# Altium PCB LED Dice.PcbDoc
Units mil, origin at the board's own origin, x right, y up, seen from the top; angles counter-clockwise.
Board outline 1950 x 950 mil, 4 copper layers (Layer 1, Layer 2, Layer 3, Layer 4), stack 22.373 mil thick; 52 components, 42 nets, 198 pads, 65 vias.
Unrouted connection lines stored in the file: 8.
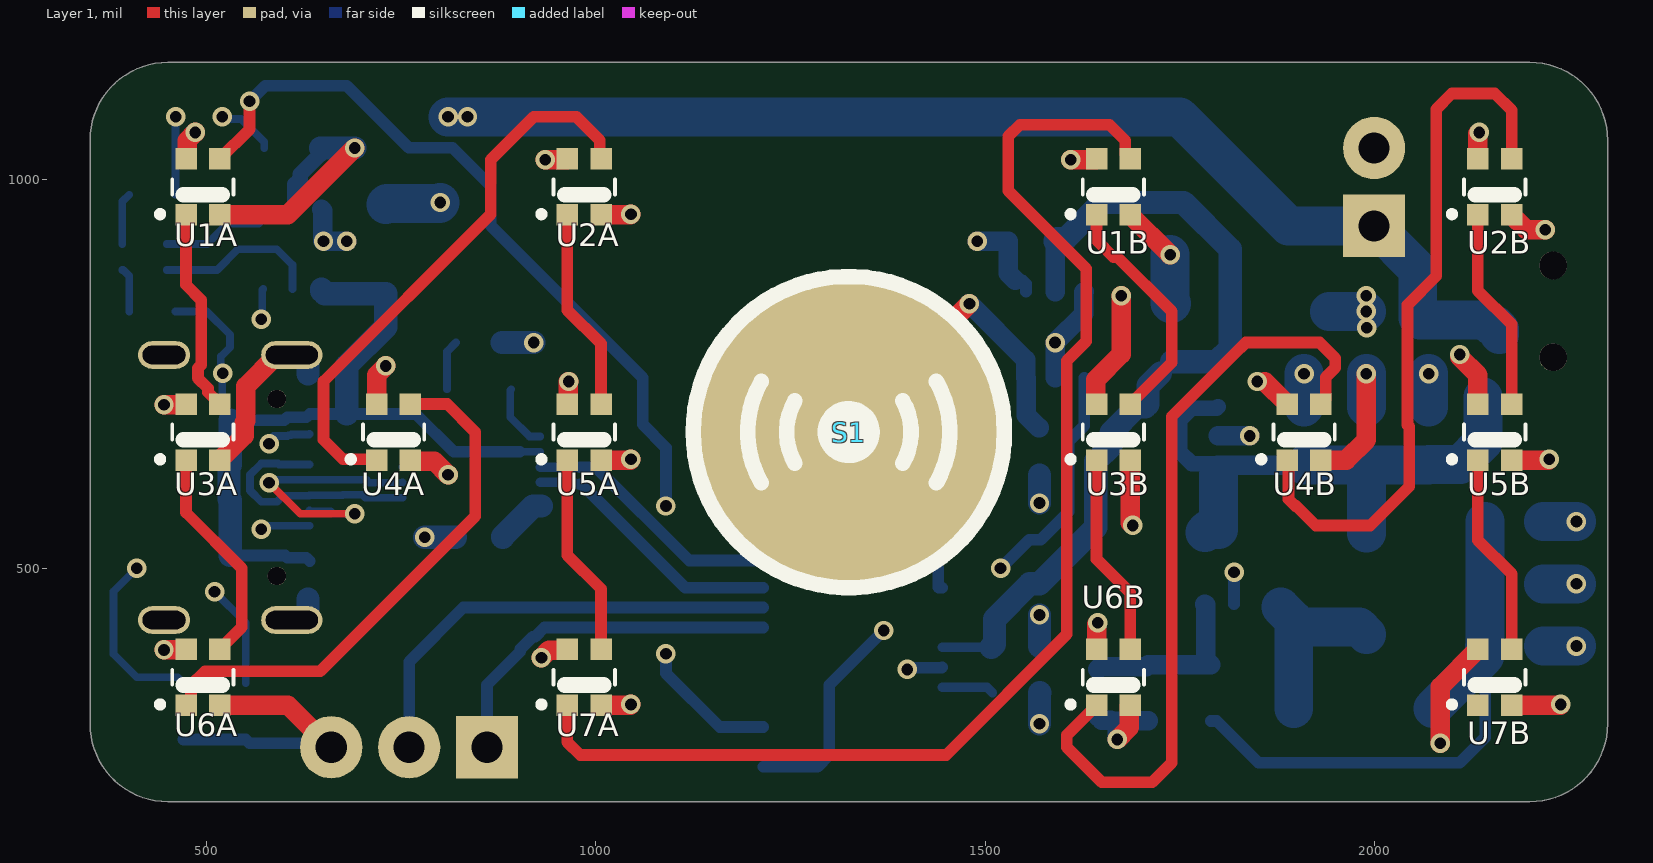
[diagram p0: Layer 1 view]
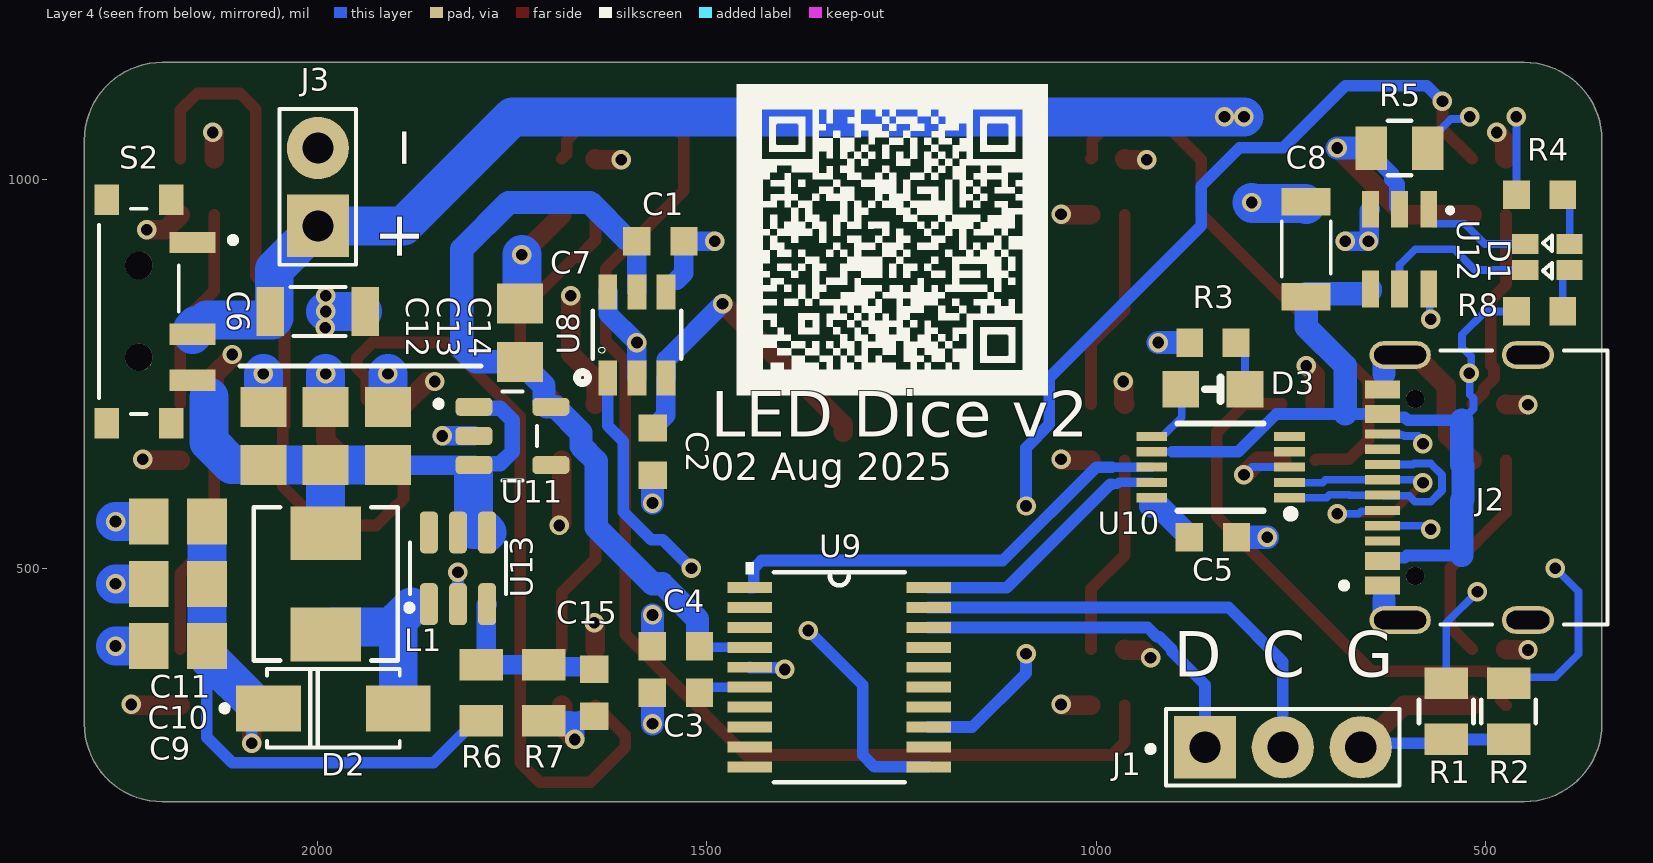
[diagram p1: Layer 4 view, seen from below]
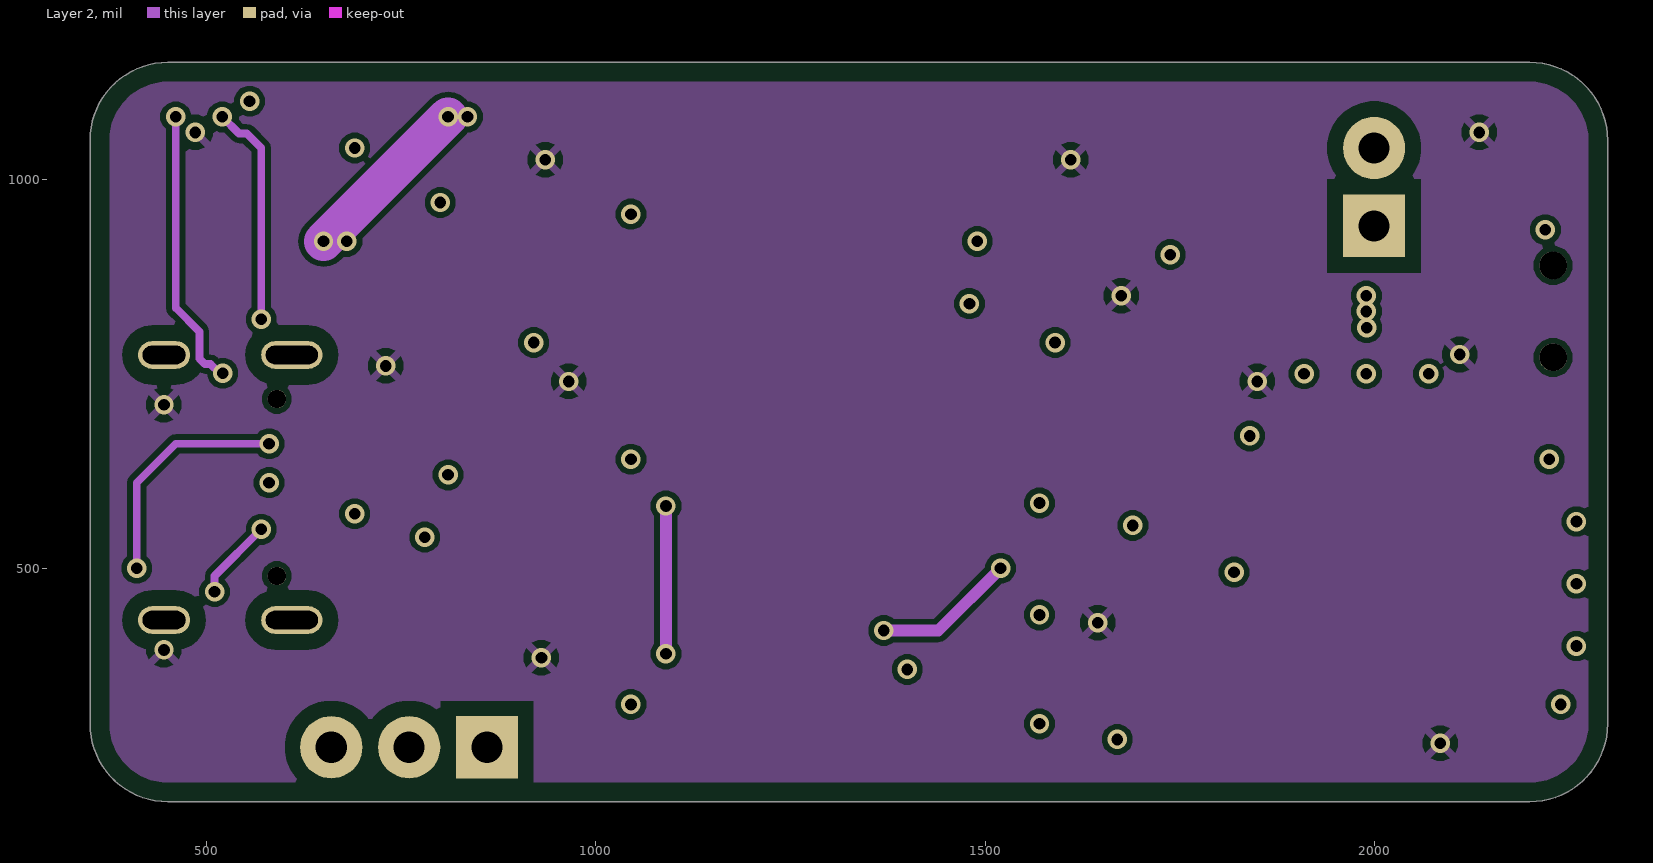
[diagram p2: Layer 2]
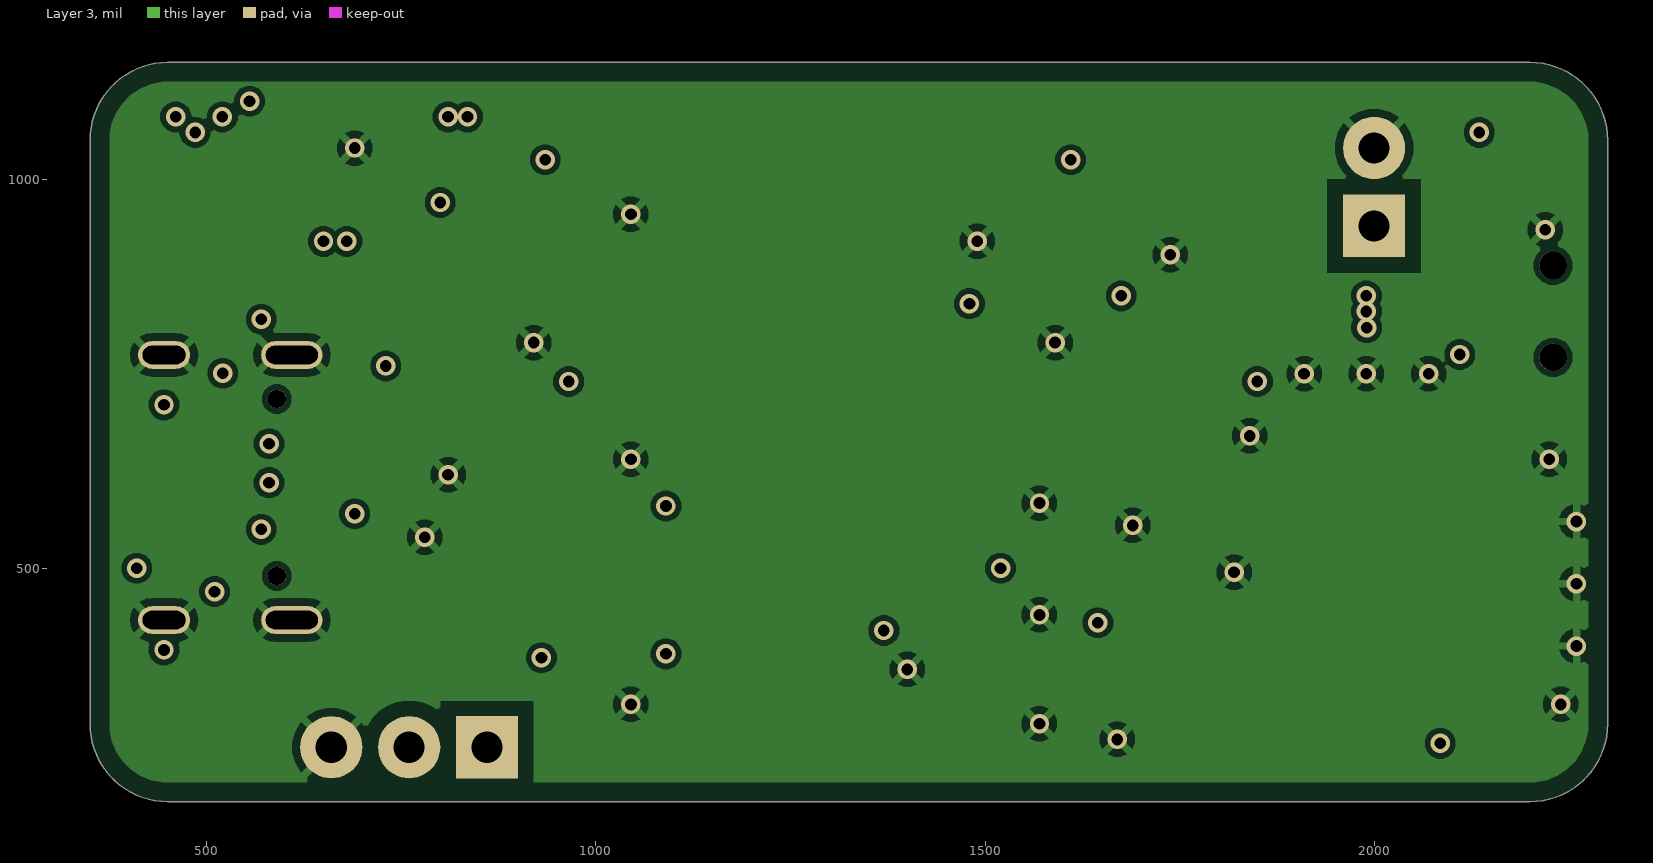
[diagram p3: Layer 3]
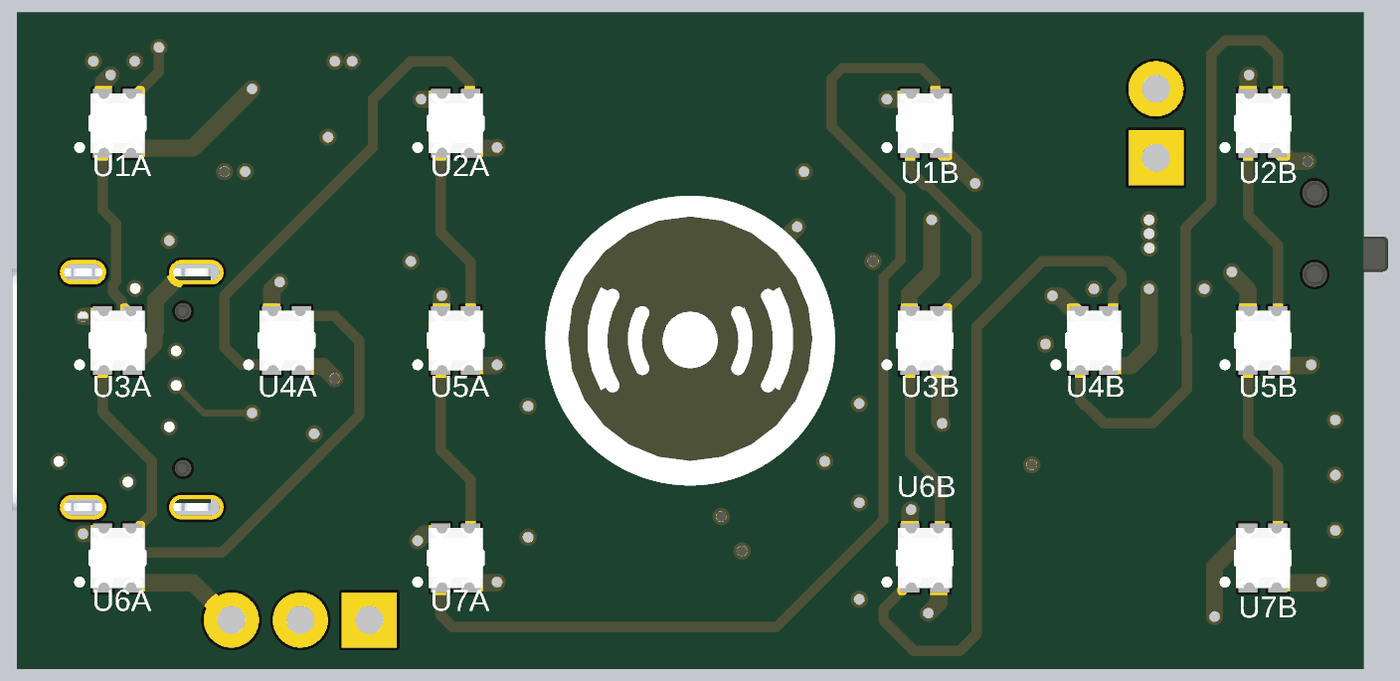
[diagram p4: 3D render of the assembled board from above, using the file's embedded part models]
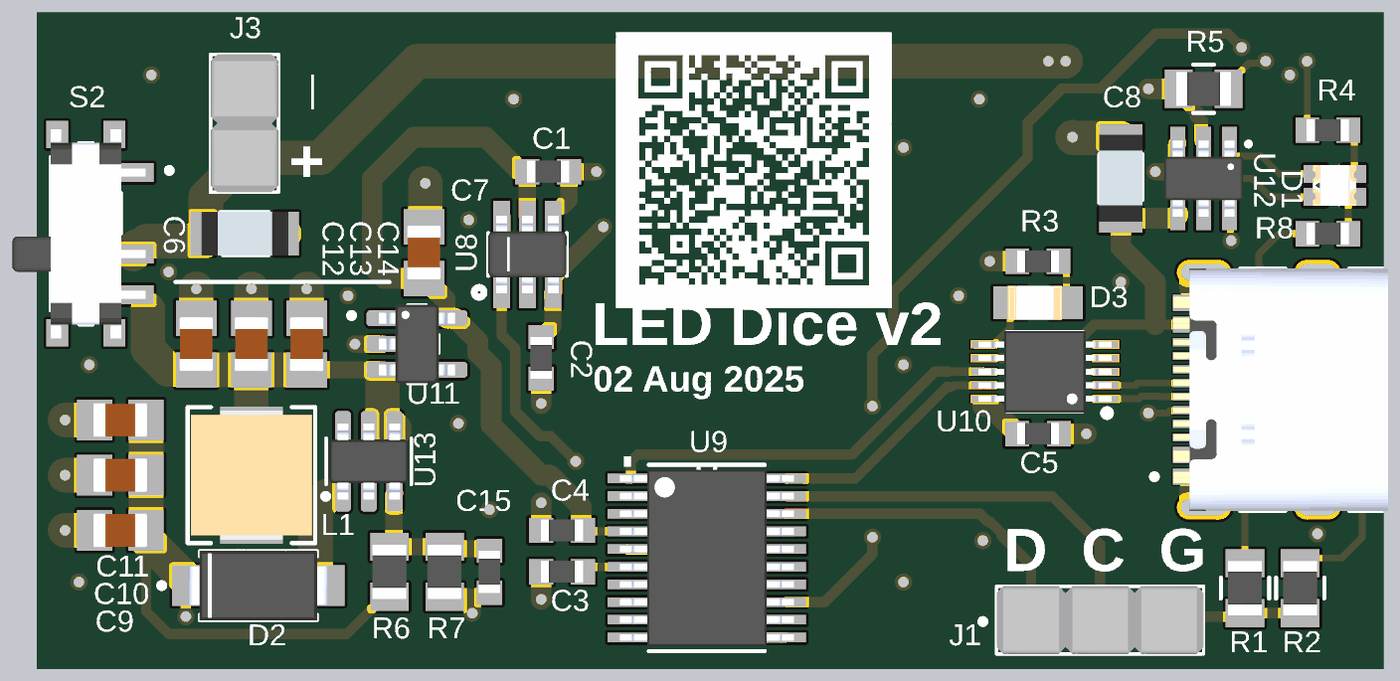
[diagram p5: 3D render of the assembled board from below, using the file's embedded part models]

## Layer stack, top to bottom
Top Solder: solder mask 0.4, Solder Resist, Dk 3.5
Layer 1: signal copper 1.378
Dielectric 2: prepreg 2.8, PP-006, Dk 4.1
Layer 2: signal copper 0.7087
Dielectric 1: dielectric 12.6, FR-4, Dk 4.8
Layer 3: signal copper 0.7087
Dielectric 3: prepreg 2.8, PP-006, Dk 4.1
Layer 4: signal copper 1.378
Bottom Solder: solder mask 0.4, Solder Resist, Dk 3.5

## Board outline
450,200 cw(c450,300) 350,300 350,1050 cw(c450,1050) 450,1150 2200,1150 cw(c2200,1050) 2300,1050 2300,300 cw(c2200,300) 2200,200

## Design rules (kind name [scope] priority, off if disabled: settings)
Clearance [All] p1: gap=7 ignorepadtopadclearanceinfootprint=FALSE except(20: SMDPad-Fill SMDPad-Poly SMDPad-Region THPad-Fill THPad-Poly THPad-Region)
PlaneClearance [All] p1: clearance=30
PolygonConnect [All] p1: connectstyle=Relief reliefconductorwidth=10 reliefentries=4 polygonreliefangle="45 Angle" airgapwidth=10
RoutingVias [All] p1: holewidth=15 width=25 viastyle="Through Hole" minholewidth=6 minwidth=10 maxholewidth=150 maxwidth=200
SolderMaskExpansion [All] p1: expansion=4 istentingtop=FALSE
SupplyNets "Schematic Supply Nets_1" [InNet('GND')] p1: voltage=0.000
SupplyNets "Schematic Supply Nets" [InNet('VUSB+')] p2: voltage=0.000
Width [All] p1: maxlimit=300 minlimit=10 preferedwidth=25
29 further rules are at their usual default settings.

## Classes and differential pairs
component class uC1: C1 C2 C3 C4 J1 S1 U8 U9
component class PS1: C5 C6 C7 C8 C9 C10 C11 C12 C13 C14 C15 D1 D2 D3 J2 J3 L1 R1 R2 R3 R4 R5 R6 R7 R8 S2 U10 U11 U12 U13
component class B: U1B U2B U3B U4B U5B U6B U7B
component class A: U1A U2A U3A U4A U5A U6A U7A
channel class "LED Matrix": A B

## Components (designator, comment, footprint, x,y, rotation, side; value= is the part's Value field where it differs from the comment)
C1 "CL10B104KB8NNNC" CAPC1608X90N 1560,920 r0 bottom
C2 "CL10C080DB81PNC" CAPC1608X90N 1570,650 r90 bottom
C3 "CL10B104KB8NNNC" CAPC1608X90N 1540,340 r180 bottom
C4 "CL10B104KB8NNNC" CAPC1608X90N 1540,400 r180 bottom
C5 "CL10B104KB8NNNC" CAPC1608X90N 850,540 r0 bottom
C6 "CL31A106KBHNNNE" WCAP-CSGP_885012208060 2000,830 r180 bottom
C7 "0805B105K500NT" CAPC2012X135N 1740,802.6 r90 bottom
C8 "CL31A106KBHNNNE" WCAP-CSGP_885012208060 730,910 r90 bottom
C9 "CL21A106KAYNNNE" CAPC2012X135N 2180,400 r180 bottom
C10 "CL21A106KAYNNNE" CAPC2012X135N 2180,480 r180 bottom
C11 "0805B104K500NT" CAPC2012X135N 2180,560 r0 bottom
C12 "CL21A106KAYNNNE" CAPC2012X135N 2070,670 r270 bottom
C13 "CL21A106KAYNNNE" CAPC2012X135N 1990,670 r270 bottom
C14 "0805B104K500NT" CAPC2012X135N 1910,670 r90 bottom
C15 "CL10B104KB8NNNC" CAPC1608X90N 1645,340 r90 bottom
D1 "LTST-C195KGJRKT" LTST-BILED-15X16 420,900 r270 bottom
D2 "SS115" DIOM4325X250N 1980,320 r180 bottom
D3 "LTST-C171KRKT" DIOC200X125X110 850,730 r0 bottom
J1 "826646-3" TE_826646-3 760,270 r180 bottom
J2 "TYPE-C-31-M-12" HRO_TYPE-C-31-M-12 445.12,603.78 r90 bottom
J3 "826646-2" TE_826646-2 2000,990 r90 bottom
L1 "FXL0420-6R8-M" IND_FXL0420_CMT 1990,480 r90 bottom
R1 "0805W8F5101T5E" RESC2012X65N 550,316.22 r90 bottom
R2 "0805W8F5101T5E" RESC2012X65N 470,316.22 r270 bottom
R3 "0603WAF1001T5E" RESC1508X60N 850,790 r0 bottom
R4 "0603WAF1001T5E" RESC1508X60N 430,980 r0 bottom
R5 "0805W8F5101T5E" RESC2012X65N 610,1040 r180 bottom
R6 "0805W8F1103T5E" RESC2012X65N 1790,340 r270 bottom
R7 "0805W8F1502T5E" RESC2012X65N 1710,340 r90 bottom
R8 "0603WAF1001T5E" RESC1508X60N 430,830 r0 bottom
S1 "touch pad 1 cm" "touch pad 1 cm" 1325,675 r0 top
S2 "EG1215AA" SW_EG1215AA 2230,830 r270 bottom
U1A "WS2812C-2020" LED_WS2812C-2020 495,990 r90 top (schematic designator U1)
U1B "WS2812C-2020" LED_WS2812C-2020 1665,990 r90 top (schematic designator U1)
U2A "WS2812C-2020" LED_WS2812C-2020 985,990 r90 top (schematic designator U2)
U2B "WS2812C-2020" LED_WS2812C-2020 2155,990 r90 top (schematic designator U2)
U3A "WS2812C-2020" LED_WS2812C-2020 495,675 r90 top (schematic designator U3)
U3B "WS2812C-2020" LED_WS2812C-2020 1665,675 r90 top (schematic designator U3)
U4A "WS2812C-2020" LED_WS2812C-2020 740,675 r90 top (schematic designator U4)
U4B "WS2812C-2020" LED_WS2812C-2020 1910,675 r90 top (schematic designator U4)
U5A "WS2812C-2020" LED_WS2812C-2020 985,675 r90 top (schematic designator U5)
U5B "WS2812C-2020" LED_WS2812C-2020 2155,675 r90 top (schematic designator U5)
U6A "WS2812C-2020" LED_WS2812C-2020 495,360 r90 top (schematic designator U6)
U6B "WS2812C-2020" LED_WS2812C-2020 1665,360 r90 top (schematic designator U6)
U7A "WS2812C-2020" LED_WS2812C-2020 985,360 r90 top (schematic designator U7)
U7B "WS2812C-2020" LED_WS2812C-2020 2155,360 r90 top (schematic designator U7)
U8 "TTP223-BA6-TD" SOT23-6#1 1590,800 r180 bottom
U9 "STM32G030F6P6" *TSSOP20 1330,360 r180 bottom
U10 "CH340E" MSOP10 840,630 r0 bottom
U11 "TLV74333PDBVR" SOT95P280X145-5N 1750,670 r180 bottom
U12 "TP4057" SOT23-6#2 610,910 r0 bottom
U13 "MT3608" SOT95P280X145-6N 1820,500 r90 bottom

## Footprints (in the part's own frame and the unit in brackets; to place one, negate y for a bottom-side part, rotate by r counter-clockwise, add the part's x,y. Pads: shape width x height; smd on the part's side, far side on the other; paste and mask are expansions set on the pad)
*TSSOP20 [mil]
  rect 57.56x13.97 smd: 1(-115,115.16) 2(-115,89.57) 3(-115,63.98) 4(-115,38.39) 5(-115,12.8) 6(-115,-12.8) 7(-115,-38.39) 8(-115,-63.98) 9(-115,-89.57) 10(-115,-115.16) 11(115,-115.16) 12(115,-89.57) 13(115,-63.98) 14(115,-38.39) 15(115,-12.8) 16(115,12.8) 17(115,38.39) 18(115,63.98) 19(115,89.57) 20(115,115.16)
  silkscreen extent -120,-135 84,148, body extent -126,-128 126,128, height 47
CAPC1608X90N [mm]
  rect 0.89x0.93 smd: 1(-0.77,0) 2(0.77,0)
  body extent -0.77,-0.4 0.77,0.4, height 0.6
CAPC2012X135N [mm]
  rect 1.3x1.5 smd: 1(-0.95,0) 2(0.95,0)
  body extent -1,-0.63 1,0.63, height 1.44
DIOC200X125X110 [mm]
  rect 1.2x1.2 smd: NEG(-1.05,0) POS(1.05,0)
  silkscreen extent -0.25,-0.38 0.25,0.38, body extent -0.89,-0.62 1.11,0.63, height 1.1
DIOM4325X250N [mm]
  rect 2.12x1.5 smd: A(2.115,0) C(-2.115,0)
  silkscreen extent -3.66,-1.28 2.16,1.28, body extent -2.57,-1.28 2.57,1.28, height 2.5
HRO_TYPE-C-31-M-12 [mm]
  rect 0.6x1.14 smd mask+0.05: A1_B12(-3.2,4.75) A4_B9(-2.4,4.75) B1_A12(3.2,4.75) B4_A9(2.4,4.75)
  rect 0.3x1.14 smd mask+0.05: A5(-1.25,4.75) A6(-0.25,4.75) A7(0.25,4.75) A8(1.25,4.75) B5(1.75,4.75) B6(0.75,4.75) B7(-0.75,4.75) B8(-1.75,4.75)
  oval 0.9x2 hole 0.6 slot 1.7 at 90 deg: S1(-4.325,4.17) S2(4.325,4.17)
  oval 0.9x1.7 hole 0.6 slot 1.4 at 90 deg: S3(-4.325,0) S4(4.325,0)
  round 0.6 hole 0.6 unplated: ""(-2.89,3.68) ""(2.89,3.68)
  silkscreen extent -4.47,-2.6 4.47,6.1, body extent -4.47,-2.6 4.47,5.31, height 3.31
IND_FXL0420_CMT [mil]
  rect 69x91 smd paste+0 mask+0: 1(-65,0) 2(65,0)
  silkscreen extent -98,-92 98,92, body extent -94,-87 94,87, height 79
LED_WS2812C-2020 [mm]
  rect 0.7x0.7 smd: 1(-0.915,0.55) 2(-0.915,-0.55) 3(0.915,-0.55) 4(0.915,0.55)
  silkscreen extent -0.99,-1 0.25,1.5, body extent -1.1,-1 1.1,1, height 0.84
LTST-BILED-15X16 [mm]
  rect 0.65x0.85 smd: P$1(0.425,0.725) P$2(-0.425,0.725) P$3(0.425,-0.725) P$4(-0.425,-0.725)
  silkscreen extent -0.7,-0.15 0.7,0.15, body extent -0.75,-0.8 0.75,0.8, height 0.55
MSOP10 [mm]
  rect 1x0.3 smd paste-1 mask+0.05: 1(-2.25,1) 2(-2.25,0.5) 3(-2.25,0) 4(-2.25,-0.5) 5(-2.25,-1) 6(2.25,-1) 7(2.25,-0.5) 8(2.25,0) 9(2.25,0.5) 10(2.25,1)
  silkscreen extent -2.41,-1.43 1.4,1.65, body extent -2.45,-1.5 2.45,1.5, height 1
RESC1508X60N [mm]
  rect 0.87x0.93 smd: 1(-0.755,0) 2(0.755,0)
  body extent -0.77,-0.4 0.78,0.4, height 0.6
RESC2012X65N [mm]
  rect 1.03x1.42 smd: 1(-0.92,0) 2(0.92,0)
  silkscreen extent -0.38,-0.89 0.38,0.89, body extent -1,-0.63 1,0.63, height 0.65
SOT23-6#1 [mil]
  rect 24x45 smd: 1(-37.4,-55.28) 2(0,-55.28) 3(37.4,-55.28) 4(37.4,55.28) 5(0,55.28) 6(-37.4,55.28)
  silkscreen extent -77,-62 57,31, body extent -57,-56 57,56, height 50
SOT23-6#2 [mil]
  rect 21.65x47.24 smd: 1(-37.4,-51.18) 2(0,-51.18) 3(37.4,-51.18) 4(37.4,51.18) 5(0,51.18) 6(-37.4,51.18)
  silkscreen extent -66,-51 -64,-49, body extent -57,-55 57,55, height 57
SOT95P280X145-5N [mm]
  rrect50% 1.21x0.59 smd: 1(-1.255,0.95) 2(-1.255,0) 3(-1.255,-0.95) 4(1.255,-0.95) 5(1.255,0.95)
  silkscreen extent -2.51,-1.45 0.8,1.45, body extent -1.4,-1.45 1.4,1.45, height 1.45
SOT95P280X145-6N [mm]
  rrect50% 1.37x0.59 smd: 1(-1.17,0.95) 2(-1.17,0) 3(-1.17,-0.95) 4(1.17,-0.95) 5(1.17,0) 6(1.17,0.95)
  silkscreen extent -1.39,-1.57 0.85,1.69, body extent -1.4,-1.45 1.4,1.45, height 1.45
SW_EG1215AA [mm]
  rect 0.7x1.5 smd: 1(-2.25,1.75) 2(0.75,1.75) 3(2.25,1.75)
  rect 1x0.8 smd: S1(-3.65,1.05) S2(-3.65,-1.05) S3(3.65,-1.05) S4(3.65,1.05)
  round 0.9 hole 0.9 unplated: ""(-1.5,0) ""(1.5,0)
  silkscreen extent -3.35,-1.3 3.35,3.17, body extent -3.85,-2.7 3.85,2.2, height 1.4
TE_826646-2 [mil]
  rect 80x80 hole 40: 1(-50,0)
  round 80 hole 40: 2(50,0)
  silkscreen extent -100,-49 100,49, body extent -100,-49 100,49, height 343
TE_826646-3 [mil]
  rect 80x80 hole 40: 1(-100,0)
  round 80 hole 40: 2(0,0) 3(100,0)
  silkscreen extent -174,-49 150,49, body extent -150,-49 150,49, height 343
"touch pad 1 cm" [mil]
  round 400 smd paste-99999 mask-99999: 1(0,0)
  silkscreen extent -200,-200 200,200, body extent -196,-194 197,200, height 4
WCAP-CSGP_885012208060 [mm]
  rect 0.9x1.6 smd: 1(-1.55,0) 2(1.55,0)
  silkscreen extent -0.9,-0.8 0.9,0.8, body extent -1.58,-0.8 1.62,0.8, height 0.98

## Part data
C1 C3 C4 C5 C15: "0.1ÂµF Â±10% 50V Ceramic Capacitor X7R 0603 _1608 Metric_", Package="0603 Samsung", Availability=Unavailable, MF="Samsung Electro-Mechanics", MP=CL10B104KB8NNNC, Price=None, SnapEDA_Link=https://www.snapeda.com/parts/CL10B104KB8NNNC/Samsung%20Electro-Mechanics/view-part/3598309/?ref=snap
C2: "50V 8pF C0G 0603 Multilayer Ceramic Capacitors MLCC - SMD/SMT ROHS", Package=None, Availability=Unavailable, MP=GRM0335C1E8R0CA01D, Price=None
C6 C8: "50V 10uF X5R ±10% 1206 Multilayer Ceramic Capacitors MLCC - SMD/SMT ROHS", Package=None, Availability=Unavailable, MP=885012208060, Price=None
C7: "50V 1uF X7R ±10% 0805 Multilayer Ceramic Capacitors MLCC - SMD/SMT ROHS"
C9 C10 C12 C13: "25V 10uF X5R ±10% 0805 Multilayer Ceramic Capacitors MLCC - SMD/SMT ROHS", Package=None, Availability=Unavailable, MP=CL31A106KPHNNNE, Price=None
C11 C14: "50V 100nF X7R ±10% 0805 Multilayer Ceramic Capacitors MLCC - SMD/SMT ROHS", Supplier Part Number 1=1763-1217-1-ND, Supplier 1=Digikey
D1: "Green, Red 571nm Green, 631nm Red LED Indication - Discrete 2V Green, 2V Red 0606 (1616 Metric)", Package=None, Availability="In Stock", Check_prices=https://www.snapeda.com/parts/LTST-C195KGJRKT/Lite-On+Inc./view-part/?ref=eda, MF="Lite-On Inc.", MP=LTST-C195KGJRKT, Price=None, Purchase-URL=https://pricing.snapeda.com/search?q=LTST-C195KGJRKT&ref=eda, SnapEDA_Link=https://www.snapeda.com/parts/LTST-C195KGJRKT/Lite-On+Inc./view-part/?ref=snap
D2: "1A, 150V, Schottky Rectifier", Package="DO-214AC-2 Taiwan Semiconductor", Supplier Part Number 1=1801-SS115TR-ND, Availability="In Stock", Check_prices=https://www.snapeda.com/parts/SS115/Taiwan+Semiconductor/view-part/?ref=eda, MF="Taiwan Semiconductor", MP=SS115, Price=None, Purchase-URL=https://pricing.snapeda.com/search/part/SS115/?ref=eda, SnapEDA_Link=https://www.snapeda.com/parts/SS115/Taiwan+Semiconductor/view-part/?ref=snap, Supplier 1=Digikey
D3: "Red LED  0805 _2012 Indication 631nm - Discrete 2V 0805 _2012 Metric_", Package="0805 Lite-On", Availability=Unavailable, MF="Lite-On Inc.", MP=LTST-C171KRKT, Price=None, SnapEDA_Link=https://www.snapeda.com/parts/LTST-C171KRKT/Lite-On%20Inc./view-part/357775/?ref=snap
J1: "Connector Header Through Hole 3 position 0.100 (2.54mm)", Package=None, Arrow_Europe-Purchase-URL=https://snapeda.com/shop?store=Arrow+Europe&id=2389612, Availability=Good, DigiKey-Purchase-URL=https://snapeda.com/shop?store=DigiKey&id=2389612, EU_RoHS_Compliance=Compliant, MF="TE Connectivity", Mouser-Purchase-URL=https://snapeda.com/shop?store=Mouser&id=2389612, MP=826646-3, Price=None, SnapEDA_Link=https://www.snapeda.com/parts/826646-3/TE%20Connectivity%20AMP%20Connectors/view-part/2389612/?ref=snap
J2: "USB Connectors 24 Receptacle 1 8.94*7.3mm RoHS", Package=Package, Availability="Not in stock", Check_prices=https://www.snapeda.com/parts/TYPE-C-31-M-12/HRO+Electronics+Co.%252C+Ltd./view-part/?ref=eda, MF="HRO Electronics Co., Ltd.", MP=TYPE-C-31-M-12, Price=None, SnapEDA_Link=https://www.snapeda.com/parts/TYPE-C-31-M-12/HRO+Electronics+Co.%252C+Ltd./view-part/?ref=snap
J3: "Conn Unshrouded Header HDR 2 POS 2.54mm Solder ST Thru-Hole", Package=None, Availability=Good, Centerline_Pitch="2.54 mm[.1 in]", DigiKey-Purchase-URL=https://snapeda.com/shop?store=DigiKey&id=470405, EU_RoHS_Compliance=Compliant, MF="TE Connectivity", Mouser-Purchase-URL=https://snapeda.com/shop?store=Mouser&id=470405, MP=826646-2, Number_of_Positions=2, Price=None, Product_Type=Connector, SnapEDA_Link=https://www.snapeda.com/parts/826646-2/TE%20Connectivity%20AMP%20Connectors/view-part/470405/?ref=snap
L1: "Description", Manufacturer_Name=Cjiang, Copyright="Copyright (C) 2025 Ultra Librarian. All rights reserved.", Manufacturer_Part_Number=FXL0420-6R8-M
R1 R2 R5: "5.1kΩ 0805  125mW Thick Film Resistors 150V ±100ppm/℃ ±1% Chip Resistor - Surface Mount ROHS"
R3 R4 R8: "1kΩ 0603 100mW Thick Film Resistors 75V ±100ppm/℃ ±1%  Chip Resistor - Surface Mount ROHS"
R6: "110kΩ 0805  125mW Thick Film Resistors 150V ±100ppm/℃ ±1% Chip Resistor - Surface Mount ROHS", Supplier Part Number 1=303-0805W8F1001T5E, Supplier 1=Mouser
R7: "15kΩ 0805  125mW Thick Film Resistors 150V ±100ppm/℃ ±1% Chip Resistor - Surface Mount ROHS", Supplier Part Number 1=303-0805W8F1001T5E, Supplier 1=Mouser
S1: "Touch pad circular 1 cm"
S2: "Slide Switch SPDT Surface Mount, Right Angle", Package=None, Check_prices=https://www.snapeda.com/parts/EG1215AA/E-Switch/view-part/?ref=eda, MF=E-Switch, MP=EG1215AA, Purchase-URL=https://pricing.snapeda.com/search/part/EG1215AA/?ref=eda, SnapEDA_Link=https://www.snapeda.com/parts/EG1215AA/E-Switch/view-part/?ref=snap
U1A U1B U2A U2B U3A U3B U4A U4B U5A U5B U6A U6B U7A U7B: "Intelligent control LED integrated light source", Package=Package, Check_prices=https://www.snapeda.com/parts/WS2812C-2020/Worldsemi/view-part/?ref=eda, MF=Worldsemi, MP=WS2812C-2020, SnapEDA_Link=https://www.snapeda.com/parts/WS2812C-2020/Worldsemi/view-part/?ref=snap
U8: "1 key touchpad detector IC", Package=None, Availability="Not in stock", Check_prices=https://www.snapeda.com/parts/TTP223-BA6/TONTEK/view-part/?ref=eda, MF=tontek, MP=TTP223-BA6, Price=None, SnapEDA_Link=https://www.snapeda.com/parts/TTP223-BA6/TONTEK/view-part/?ref=snap
U9: "ARMÂ® CortexÂ®-M0+ STM32G0 Microcontroller IC 32-Bit Single-Core 64MHz 32KB (32K x 8) FLASH 20-TSSOP", Package="TSSOP-20 STMicroelectronics", Check_prices=https://www.snapeda.com/parts/STM32G030F6P6/STMicroelectronics/view-part/?ref=eda, MF=STMicroelectronics, MP=STM32G030F6P6, SnapEDA_Link=https://www.snapeda.com/parts/STM32G030F6P6/STMicroelectronics/view-part/?ref=snap
U10: "USB to serial chip CH340", Package=Package, Check_prices=https://www.snapeda.com/parts/CH340E/WCH/view-part/?ref=eda, MF=WCH, MP=CH340E, SnapEDA_Link=https://www.snapeda.com/parts/CH340E/WCH/view-part/?ref=snap
U11: "300mA Fixed 3.3V Positive electrode 5.5V SOT-23-5 Voltage Regulators - Linear, Low Drop Out (LDO) Regulators ROHS", Package="SOT-23-5 Texas Instruments", Availability=Warning, Check_prices=https://www.snapeda.com/parts/TLV74330PDBVR/Texas%20Instruments/view-part/2878367/?ref=eda, MF="Texas Instruments", MP=TLV74330PDBVR, Price=None, Purchase-URL=https://pricing.snapeda.com/search/part/TLV74330PDBVR/?ref=eda, SnapEDA_Link=https://www.snapeda.com/parts/TLV74330PDBVR/Texas%20Instruments/view-part/2878367/?ref=snap
U12: "500mA linear li-ion battery charger TP4057 actual charge current to 500ma,", Package=None, Availability="Not in stock", Check_prices=https://www.snapeda.com/parts/TP4057/Top+Power/view-part/?ref=eda, MF=toppower, MP=TP4057, Price=None, SnapEDA_Link=https://www.snapeda.com/parts/TP4057/Top+Power/view-part/?ref=snap
U13: "High Efficiency 1.2MHz2A Step Up Converter", Package=Package, Availability="Not in stock", Check_prices=https://www.snapeda.com/parts/MT3608/Aerosemi+Technology+Co.%252C+Ltd/view-part/?ref=eda, MF="Aerosemi Technology Co., Ltd", MP=MT3608, Price=None, SnapEDA_Link=https://www.snapeda.com/parts/MT3608/Aerosemi+Technology+Co.%252C+Ltd/view-part/?ref=snap

## Via types
v1: diameter 25, hole 15, Layer 1 to Layer 4, tented both sides, 65 vias

## Nets (pads, with @x,y where several pads share a name; then routed paths per layer and width w, separated by ;. In a path a pad name is that pad's centre, name@x,y a point inside that pad or via, vN(x,y) a via of type N, cw(c..) or ccw(c..) an arc to the next point about the centre after c; other vN are vias at no path point)
+3.3V: C1.2 C4.2 C7.1 U8.5 U9.4 U11.5 | length 1063.8
  Layer 4 w12: U9.4 C4.2@1508.07,398.39
  Layer 4 w25: U8.5@1590.16,855.43 C1.2@1590.16,919.84
  Layer 4 w30: C4.2@1508.07,398.39 C4.2 1512.2,402.52 1512.2,434.53 1557.67,480 1570,480 1642.31,552.31 1642.31,637.46 1661.9,657.05 1661.9,674.15 1695.16,707.4 U11.5 1706.02,707.4 1709.41,710.79 1709.41,734.61 C7.1@1725.47,750.67 ; C1.2@1590.16,919.84 C1.2 1590.32,920.79 1592.83,923.31 1603.72,923.31 1650.41,970 1755,970 1815,910 1815,782.77 1797.43,765.2 C7.1
+5V: C9.2 C10.2 C11.1 D2.C R6.2 U1A.4 U1B.4 U2A.4 U2B.4 U3A.4 U3B.4 U4A.4 U4B.4 U5A.4 U5B.4 U6A.4 U6B.4 U7A.4 U7B.4 | length 1589.6
  Layer 1 w15: v1@1643.35,428.35 v1(1645,430) ; v1(1850,740) v1@1859.37,740 ; v1@2110,771.69 v1(2110,774.67) ; v1@2133.35,1058.35 v1(2135,1060)
  Layer 1 w25: v1(445,395) 472.32,395 U6A.4 ; v1(445,710) 472.32,710 U3A.4 ; U1A.4 474.63,1027.3 474.63,1049.37 485,1059.75 v1(485,1060) ; U4A.4 718.35,748.35 v1(730,760) ; v1(930,385) 939.74,394.74 962.07,394.74 U7A.4 ; v1(935,1025) 962.32,1025 U2A.4 ; U5A.4 964.63,712.3 964.63,739.63 v1(965,740) ; v1(1610,1025) 1642.32,1025 U1B.4 ; U6B.4 v1@1643.35,428.35 ; U3B.4 1642.48,711.89 1642.48,742.48 1675,775 v1(1675,850) ; v1@1859.37,740 U4B.4 ; v1(2085,275) 2085,347.68 U7B.4 ; v1@2110,771.69 2133.35,748.35 U5B.4 ; U2B.4 v1@2133.35,1058.35
  Layer 4 w15: R6.2 1797.68,303.78 1851.46,250 2110,250 2142.6,282.6 C9.2 ; D2.C@2075.47,320 2085,310.47 v1(2085,275)
  Layer 4 w50: D2.C@2075.47,320 2142.01,386.54 2142.01,399.41 C9.2 C10.2 C11.1
Batt+: C6.2 J3.1 S2.2 U12.3 | length 1853.1
  Layer 2 w50: v1(650,920) v1(810,1080)
  Layer 4 w25: U12.3 649.07,959.51 649.07,920.93 v1(650,920) v1(680,920)
  Layer 4 w50: v1(810,1080) 1750,1080 1890,940 J3.1 2056.1,883.9 2056.1,821.93 2058.86,819.17 2142.4,819.17 2149.88,811.69 2156.57,811.69 2161.1,807.17 S2.2 ; C6.2@1942.52,830 v1(1990,830)
  other v1: 1990.4,809.17 1990,850 835,1080
DIN_A: U1A.3 U9.13 | length 1334.5
  Layer 1 w15: U1A.3 555,1064.37 v1(555,1100)
  Layer 2 w15: v1(1090,390) v1(1090,580)
  Layer 4 w15: v1(555,1100) 575,1120 680,1120 759.5,1040.5 815.71,1040.5 865,991.21 865,940 1060,745 1060,685 1090,655 v1(1090,580) ; v1(1090,390) 1090,365 1158.98,296.02 U9.13
DIN_B: U1B.3 U7A.1 | length 1643.1
  Layer 1 w15: U7A.1 963.35,276.65 980,260 1450,260 1605,415 1605,766.82 1630,791.82 1630,885 1530,985 1530,1055 1545,1070 1660,1070 1680.37,1049.63 1680.37,1032.3 U1B.3
DN: J2.A7 J2.B7 U10.2 | length 360.8
  Layer 1 w10: v1(580,610) 620,570 v1(690,570)
  Layer 4 w10: v1(580,610) 587,610.03 590.59,613.62 J2.A7 705.07,613.62 708.69,610 751.1,610 U10.2 ; J2.B7 633.03,573.35 659.15,573.35 662.5,570 v1(690,570)
DOUT_B: U7B.1
DP: J2.A6 J2.B6 U10.1 | length 310.6
  Layer 4 w10: J2.B6 592.86,633.31 591.67,634.5 569.85,634.5 555.5,620.15 555.5,599.85 569.85,585.5 590.15,585.5 597.68,593.03 631.22,593.03 J2.A6 674.58,593.94 675.14,594.5 700.15,594.5 704.02,590.63 U10.1
fb_boost: C15.2 R6.1 R7.2 U13.3 | length 228.2
  Layer 4 w25: C15.2 1647.95,373.27 1707.05,373.27 R7.2 R6.1 1783.48,382.74 1783.48,453.05 U13.3
GND: C1.1 C2.1 C3.1 C4.1 C5.1 C6.1 C7.2 C8.1 C9.1 C10.1 C11.2 C12.1 C13.1 C14.2 C15.1 J1.3 J2.A1_B12 J2.B1_A12 J2.S1 J2.S2 J2.S3 J2.S4 J3.2 R1.2 R2.1 R3.2 R5.1 R7.1 U1A.2 U1B.2 U2A.2 U2B.2 U3A.2 U3B.2 U4A.2 U4B.2 U5A.2 U5B.2 U6A.2 U6B.2 U7A.2 U7B.2 U8.2 U8.4 U8.6 U9.5 U10.3 U11.2 U12.2 U13.2 | length 2718.1
  Layer 1 w15: v1@1686.65,558.35 v1(1690,555) ; v1@2223.98,638.98 v1(2225,640) ; v1@2238.98,323.98 v1(2240,325)
  Layer 1 w25: U6A.2 604.38,323.98 658.35,270 J1.3 ; U3A.2 548,670.32 548,687.23 550.29,689.52 550.29,733.88 590.46,774.06 J2.S2 ; U1A.2 603.98,953.98 v1(690,1040) ; U4A.2 762.93,637.7 792.3,637.7 v1(810,620) ; U7A.2 1043.98,323.98 v1(1045,325) ; U5A.2 1043.98,638.98 v1(1045,640) ; U2A.2 1043.98,953.98 v1(1045,955) ; v1(1670,280) 1685.37,295.37 1685.37,322.7 U6B.2 ; v1@1686.65,558.35 U3B.2 ; U1B.2 1737.63,903 v1(1737.96,903) ; U4B.2 1963.98,638.98 1990,665 v1(1990,750) ; U7B.2 v1@2238.98,323.98 ; U5B.2 v1@2223.98,638.98 ; U2B.2 2195.63,935 v1(2220,935)
  Layer 4 w10: U10.3 800,630 v1(810,620)
  Layer 4 w15: 470,280 550,280 555,275 655,275 J1.3 ; U12.2 U12.2@613.33,964.51 ; R5.1@646.22,1032.32 R5.1 ; v1(1400,370) 1402.28,372.28 1444.48,372.28 U9.5 ; 1538.6,870.28 1548.1,870.28 1552.6,865.78 U8.4 ; U13.2 v1(1820,495)
  Layer 4 w20: U12.2@613.33,964.51 613.33,993.33 620,1000 620,1006.1 R5.1@646.22,1032.32
  Layer 4 w25: v1(1490,920) C1.1 1529.68,879.19 1538.6,870.28 ; U8.2 v1(1590,790) 1626.9,826.9 1626.9,854.78 U8.6 ; C15.1 1650.02,304.67 1661.61,304.67 1670,296.28 ; v1(1670,280) 1670,303.32 ; 1677.22,303.78 R7.1 ; U11.2 v1(1840,670)
  Layer 4 w30: J2.S1 627.49,433.5 630,436.01 630,460 ; J2.S2 627.49,774.06 630,771.55 630,750 ; R5.1 v1(690,1040) ; v1(780,540) C5.1 ; R3.2 v1(920,790) ; v1(1570,300) 1570,339.69 C3.1 ; v1(1570,440) 1570,400.31 C4.1 ; v1(1570,583.79) C2.1
  Layer 4 w50: v1(1737.96,903) 1737.96,840.59 1738.55,840 C7.2 ; C14.2 v1(1910,750) ; C13.1 v1(1990,750) ; C12.1 v1(2070,750) ; C9.1 v1(2260,400) ; C10.1 v1(2260,480) ; C11.2 v1(2260,560)
NetD1_P$1: D1.P$1 R8.1 | length 57.5
  Layer 4 w10: D1.P$1 392.48,883.27 400.28,875.47 R8.1
NetD1_P$2: D1.P$2 R4.1 | length 66.9
  Layer 4 w10: D1.P$2 391.46,971.18 R4.1
NetD1_P$3: D1.P$3 U12.5 | length 212
  Layer 4 w10: D1.P$3 513.27,883.27 540,910 590,910 610,890 U12.5
NetD1_P$4: D1.P$4 U12.1 | length 150
  Layer 4 w10: D1.P$4 500.61,916.73 526.44,942.56 566.77,942.56 572.6,948.39 U12.1
NetD2_A: D2.A L1.1 U13.1 | length 237.8
  Layer 4 w50: 1880,450 1896.73,433.27 ; D2.A 1896.73,433.27 ; L1.1 1980.5,424.5 1905.5,424.5 1896.73,433.27
NetD3_NEG: D3.NEG R3.1 | length 64.8
  Layer 4 w10: D3.NEG 808.66,778.39 R3.1
NetD3_POS: D3.POS U10.6 | length 85.2
  Layer 4 w10: D3.POS 890,728.66 890,694.17 914.8,669.37 U10.6
NetJ2_A5: J2.A5 R1.1 | length 303
  Layer 2 w10: v1(510,470) 510,490 v1(570,550)
  Layer 4 w10: v1(510,470) 550,430 550,352.44 ; v1(570,550) 574.57,554.57 J2.A5
NetJ2_B5: J2.B5 R2.2 | length 588.5
  Layer 2 w10: v1(410,500) 410,610 460,660 v1(580,660)
  Layer 4 w10: v1(410,500) 380,470 380,390 410,360 462.44,360 470,352.44 ; v1(580,660) 580,664.06 585.86,669.92 585.86,670 603.82,670 604.71,670.9 608.12,670.9 609,671.77 631.22,671.77 J2.B5
NetR5_2: R5.2 U12.6 | length 401.3
  Layer 2 w10: v1(520,1080) 541.44,1058.56 551.44,1058.56 570,1040 v1(570,820)
  Layer 4 w10: v1(520,1080) 522.87,1077.13 544.33,1077.13 573.78,1047.68 R5.2 ; v1(570,820) 571.3,821.3 571.3,857.52 U12.6
NetU1A_1: U1A.1 U3A.3 | length 264.6
  Layer 1 w15: U1A.1 473.35,864.35 493.08,844.61 493.08,761.27 488.62,756.8 488.62,744.38 501.63,731.37 501.63,726.05 U3A.3
NetU1B_1: U1B.1 U3B.3 | length 308
  Layer 1 w15: U1B.1 1643.35,921.65 1665,900 1670,900 1740,830 1740,764.37 U3B.3
NetU2A_1: U2A.1 U5A.3 | length 260.9
  Layer 1 w15: U2A.1 963.35,831.65 1006.65,788.35 U5A.3
NetU2A_3: U2A.3 U4A.1 | length 728.1
  Layer 1 w15: U4A.1 717.32,640 675,640 650,665 650,740 865,955 865,1025 920,1080 975,1080 1005,1050 1005,1027.68 U2A.3
NetU2B_1: U2B.1 U5B.3 | length 260.9
  Layer 1 w15: U2B.1 2133.35,856.65 2176.65,813.35 U5B.3
NetU2B_3: U2B.3 U4B.1 | length 918
  Layer 1 w15: U4B.1 1890,637.32 1890,588.79 1898.79,580 1900,580 1925,555 1995,555 2045,605 2045,682.09 2043,684.09 2043,838.55 2080,875.55 2080,1090 2100,1110 2155,1110 2176.65,1088.35 U2B.3
NetU3A_1: U3A.1 U6A.3 | length 284.4
  Layer 1 w15: U3A.1 473.35,571.65 545,500 545,424.37 U6A.3
NetU3B_1: U3B.1 U6B.3 | length 260.9
  Layer 1 w15: U3B.1 1643.35,511.65 1686.65,468.35 U6B.3
NetU4A_3: U4A.3 U6A.1 | length 690
  Layer 1 w15: U6A.1 479.63,330.26 479.63,349.63 497.74,367.74 645.93,367.74 845,566.82 845,675 808.98,711.02 U4A.3
NetU4B_3: U4B.3 U6B.1 | length 1003.1
  Layer 1 w15: U6B.1 1605,285.63 1605,270 1650,225 1715,225 1740,250 1740,695 1820,775 1835,790 1930,790 1950,770 1950,757.57 1937.93,745.51 1937.93,717.3 U4B.3
NetU5A_1: U5A.1 U7A.3 | length 260.9
  Layer 1 w15: U5A.1 963.35,516.65 1006.65,473.35 U7A.3
NetU5B_1: U5B.1 U7B.3 | length 260.9
  Layer 1 w15: U5B.1 2133.35,536.01 2176.65,492.71 U7B.3
NRST: C3.2 U9.6 | length 67.7
  Layer 4 w12: U9.6 1502.48,347.2 C3.2
RXD: U9.1 U10.8 | length 594.8
  Layer 4 w12: U10.8 980,630
  Layer 4 w15: 980,630 1000,630 1120,510 1430,510 1440,500 1440,475.67 1440.52,475.16 U9.1
SWCLK: J1.2 U9.19 | length 593.8
  Layer 4 w15: J1.2 760,380 829.57,449.57 U9.19
SWDIO: J1.1 U9.18 | length 467.5
  Layer 4 w15: J1.1 860,350 903,393 903,396.18 918.82,412 922,412 933.98,423.98 U9.18
touchIn: U8.1 U9.11 | length 761.4
  Layer 2 w15: v1(1370,420) 1440,420 v1(1520,500)
  Layer 4 w15: U9.11 1284.84,244.84 1300,260 1300,350 v1(1370,420) ; v1(1520,500) 1556.69,536.69 1571.69,536.69 1607.81,572.81 1607.81,651.75 1607.81,663.41 1627.4,683 U8.1
touchPad: C2.2 S1.1 U8.3 | length 426.6
  Layer 1 w25: S1.1 1325,685 v1(1480,840)
  Layer 4 w25: v1(1480,840) 1552.1,767.9 1552.1,745.22 U8.3 1553.1,744.22 1553.1,696.43 1569.21,680.32 C2.2
TXD: U9.20 U10.9 | length 342.4
  Layer 4 w12: U10.9 970.69,610.32 973.01,608 979.68,608
  Layer 4 w15: 979.68,608 982,608 1114.84,475.16 U9.20
V3: C5.2 U10.10 | length 66.7
  Layer 4 w30: C5.2 880.32,540.79 919.53,580 930,580
Vbatt: C12.2 C13.2 C14.1 L1.2 S2.3 U11.1 U11.3 U13.4 U13.5 | length 737.5
  Layer 4 w20: U11.3@1797.8,634.21 1765.79,634.21 1750,650 1750,690 1765.79,705.79 1797.8,705.79 U11.1
  Layer 4 w25: U11.3@1800,632.6 C14.1
  Layer 4 w50: U13.4 1786.54,550 1800,550 1800,620 ; C14.1 C13.2 ; L1.2 C13.2 ; 2140,720 2140,662.48 2110.71,633.19 2070.59,633.19 C12.2 C13.2
VUSB+: C8.2 J2.A4_B9 J2.B4_A9 R4.2 R8.2 U10.7 U12.4 | length 1704.7
  Layer 2 w10: v1(460,1080) 460,834.53 490.58,803.95 490.58,769.42 497.65,762.35 504.78,762.35 516.53,750.59 v1(520.59,750.59)
  Layer 4 w10: R8.2 500,830 530,800 530,784.06 517.87,771.93 v1@517.87,747.87 ; R4.2 459.72,1079.72 v1(460,1080) ; v1(520.59,750.59) 520,750 520,723.09 515,718.09 515,705 530,690 ; 902.17,649.68 U10.7
  Layer 4 w15: 530,516.31 600.9,516.31 603.61,513.6 627.82,513.6 J2.A4_B9 ; 530,690 599.65,690 603.61,693.96 627.82,693.96 J2.B4_A9 680,698.27 768.62,698.27 817.2,649.68 902.17,649.68
  Layer 4 w30: 530,516.31 530,587.17 528.5,588.67 528.5,631.33 530,632.83 530,690 ; U12.4 647.4,856.69 651.57,852.52 730,852.52 730,810 680,760 680,698.27
  Layer 4 w50: C8.2@730,967.48 731.38,968.86 798.86,968.86 v1(800,970)
pads on no net: J2. J2.A8 J2.B8 S2. S2.1 S2.S1 S2.S2 S2.S3 S2.S4 U9.2 U9.3 U9.7 U9.8 U9.9 U9.10 U9.12 U9.14 U9.15 U9.16 U9.17 U10.4 U10.5 U11.4 U13.6

## Polygon pours and split planes (outlines as drawn)
GND on Layer 3 "PGND_3" (solid, pour order 0): 450,225 cw(c450,300) 375,300 375,1050 cw(c450,1050) 450,1125 2200,1125 cw(c2200,1050) 2275,1050 2275,300 cw(c2200,300) 2200,225
+5V on Layer 2 "PGND_3" (solid, pour order 1): 450,225 cw(c450,300) 375,300 375,1050 cw(c450,1050) 450,1125 2200,1125 cw(c2200,1050) 2275,1050 2275,300 cw(c2200,300) 2200,225

## Silkscreen, mask and mechanical layers (free items; w line width, h text height)
Bottom Overlay:
  drawing of 95 lines, arcs and shapes, not listed
  text "_" at 1892.33,1060 h100 r90
  text "+" at 1939.25,960 h100 r90
  text "LED Dice v2" at 1495,650 h100
  text "02 Aug 2025" at 1495,601.32 h60
  text "D  C  G" at 900,341.2 h100

## Dimensions
2300,1050 to 2155,1160 on Mechanical 13
350,300 to 740,485 on Mechanical 13
450,200 to 440,360 on Mechanical 13
450,1150 to 455,990 on Mechanical 13
350,1050 to 985,1200 on Mechanical 13
350,1050 to 495,1155 on Mechanical 13
2200,1150 to 2095,675 on Mechanical 13
350,300 to 1325,185 on Mechanical 13
450,1150 to 450,200 on Mechanical 13
350,300 to 2300,300 on Mechanical 13

## Text inside footprints (layer, text, board x,y; h text height)
J2: Mechanical 13 "PCB EDGE" at 370.31,808.5 h24 r270